# Altium PCB Yapa2.PcbDoc
Units mm, origin at the board's own origin, x right, y up, seen from the top; angles counter-clockwise.
Board outline 80 x 40 mm, 2 copper layers (Top Layer, Bottom Layer); 116 components, 96 nets, 419 pads, 194 vias.
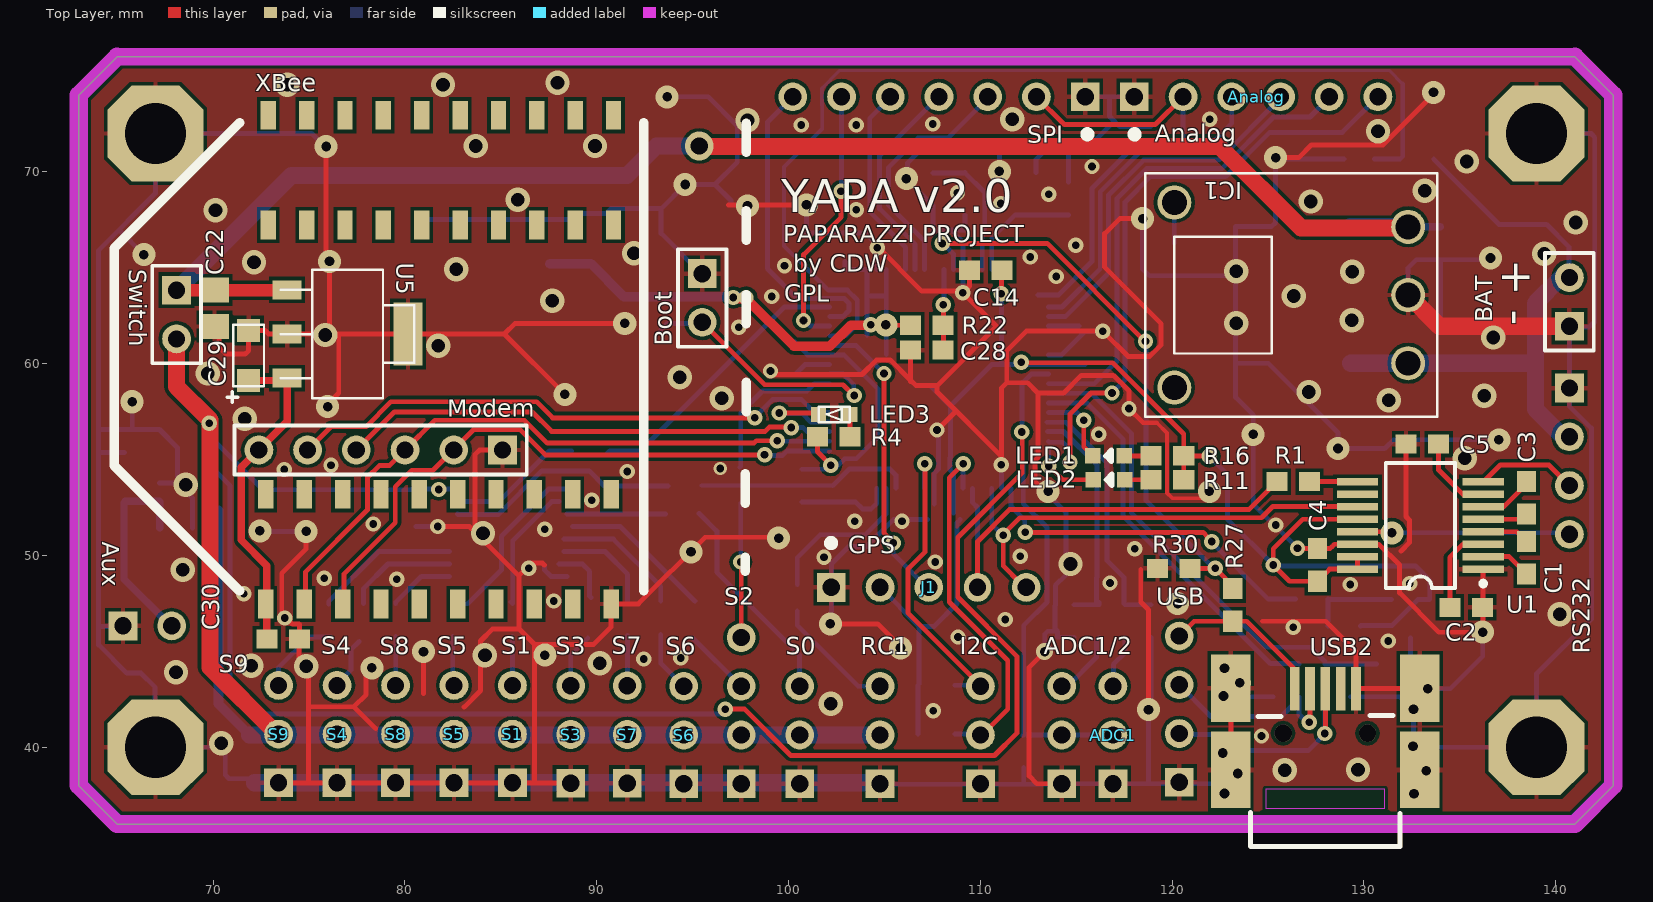
[diagram p0: Top Layer view]
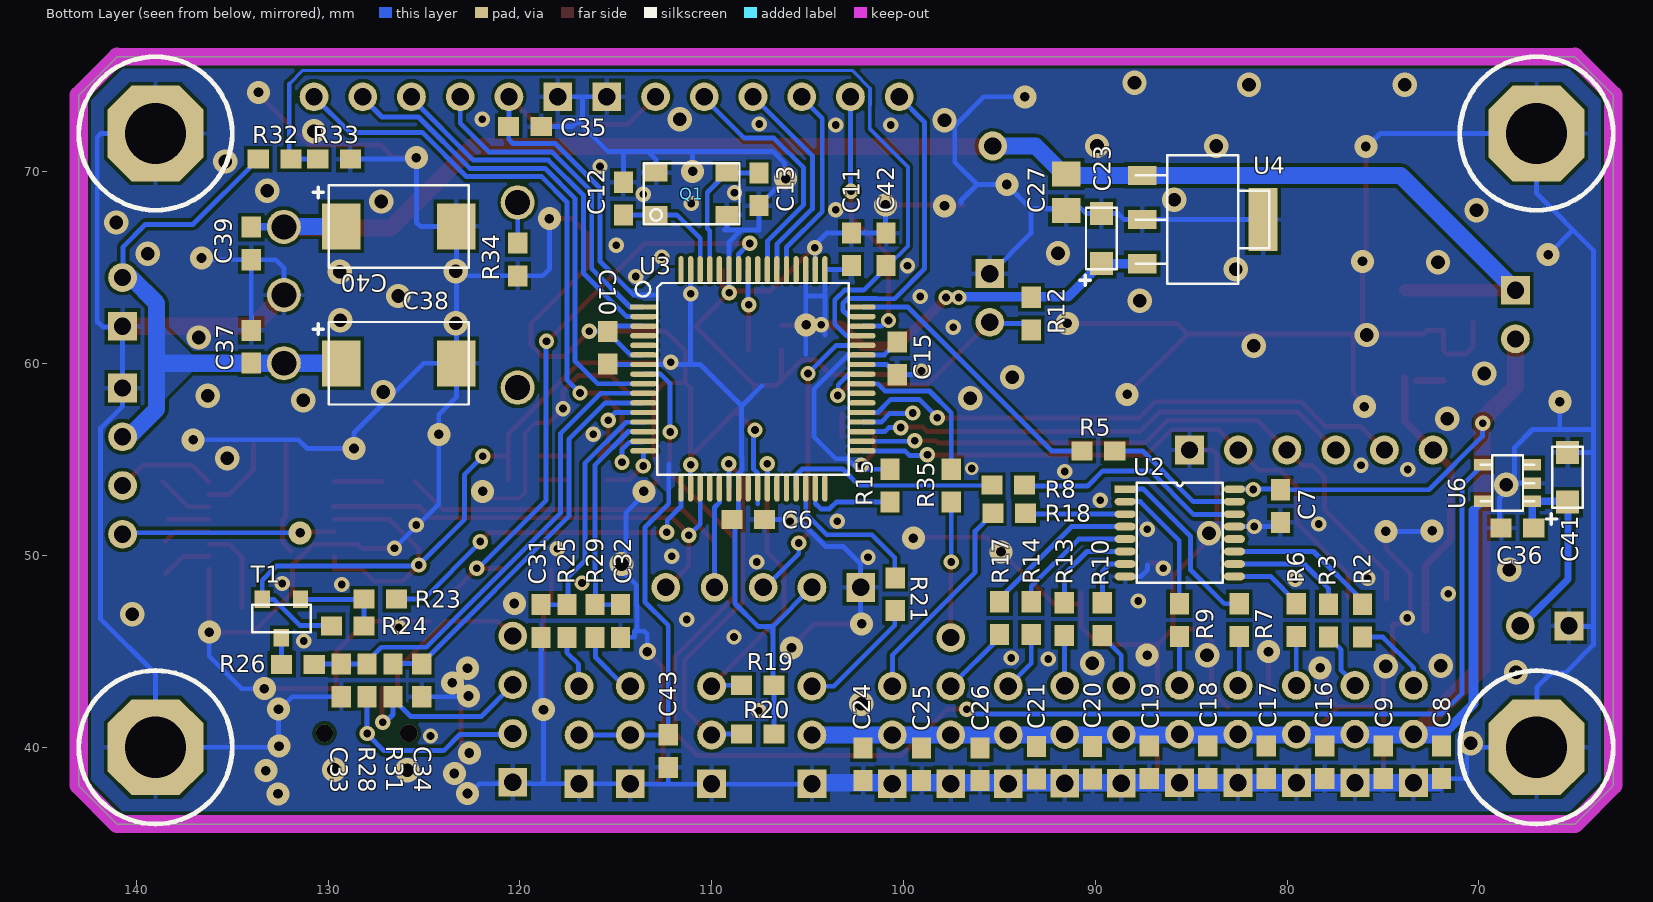
[diagram p1: Bottom Layer view, seen from below]

## Layer stack, top to bottom
Top Layer: signal copper 0.0356
Dielectric: dielectric 0.32, FR-4, Dk 4.8
Bottom Layer: signal copper 0.0356

## Board outline
63,38 63,74 65,76 141,76 143,74 143,38 141,36 65,36

## Design rules (kind name [scope] priority, off if disabled: settings)
Clearance [All] p1: gap=0.178
ComponentClearance [All] p1 off: gap=0 collisioncheckmode=3 verticalgap=0 showdistances=FALSE
HoleSize [All] p1: absolutevalues=TRUE maxlimit=5 minlimit=0.025 maxpercent=80.000 minpercent=20.000
MinimumSolderMaskSliver [All] p1: minsoldermaskwidth=0
PlaneConnect PlaneConnectVia [IsVia] p1: planeconnectstyle=Direct reliefexpansion=0.508 reliefentries=4 reliefconductorwidth=0.254 reliefairgap=0.254
PlaneConnect [All] p2: planeconnectstyle=Relief reliefexpansion=0.508 reliefentries=4 reliefconductorwidth=0.254 reliefairgap=0.254
PolygonConnect PolygonConnect_Via [IsVia] p1: connectstyle=Direct reliefconductorwidth=0.254 reliefentries=4 polygonreliefangle="90 Angle"
PolygonConnect [All] p2: connectstyle=Relief reliefconductorwidth=0.254 reliefentries=4 polygonreliefangle="90 Angle"
RoutingVias [All] p1: holewidth=0.711 width=1.27 viastyle="Through Hole" minholewidth=0.3 minwidth=0.7 maxholewidth=3 maxwidth=5
SilkToSilkClearance [All] p1: silktosilkclearance=0.025
SilkscreenOverComponentPads [All] p1 off: minsilkscreentomaskgap=0.025
SolderMaskExpansion SolderMaskExpansion_Via [IsVia] p1: expansion=-2.54
SolderMaskExpansion [All] p2: expansion=0.102
TestPointUsage [All] p1: valid=0 allowmultiple=FALSE
Testpoint [All] p1: side=15 testpointundercomponent=TRUE minsize=1.016 maxsize=2.54 preferedsize=1.524 minholesize=0 maxholesize=1.016 preferedholesize=0.813 testpointgrid=0.025 style=1023 order=0123456789
Width [All] p1: maxlimit=1.27 minlimit=0.152 preferedwidth=0.254 toplayer_minwidth=0.178 bottomlayer_minwidth=0.178 minimp=50.000000 maximp=50.000000 favimp=50.000000
18 further rules are at their usual default settings.

## Classes and differential pairs
component class Uart0: C1 C2 C3 C4 C5 R1 RS232 U1

## Components (designator, comment, footprint, x,y, rotation, side; value= is the part's Value field where it differs from the comment)
ADC1 "P1" HDR3 116.916,38.1 r90 top
ADC1/2 "P2" HDR3 114.249,38.1 r90 top
Analog "Analog" HDR6 118.034,73.914 r0 top
Aux "Digital" HDR2 65.303,46.33 r0 top
BAT "SUPPLY" HDR1X2 140.716,61.951 r90 top
Boot "Boot" HDR1X2 95.504,64.694 r270 top
C1 "0603" 0603 138.481,49.886 r270 top
C2 "0603" 0603 135.331,47.295 r0 top
C3 "0603" 0603 138.481,53.01 r270 top
C4 "0603" 0603 127.584,49.505 r270 top
C5 "0603" 0603 133.045,55.804 r0 top
C6 "100nF" 0603 108.102,51.867 r180 bottom
C7 "100nF" 0603 80.355,52.578 r270 bottom
C8 "100nF" 0603 71.945,39.212 r270 bottom
C9 "100nF" 0603 74.993,39.212 r270 bottom
C10 "100nF" 0603 115.418,60.833 r270 bottom
C11 "100nF" 0603 102.718,65.964 r90 bottom
C12 "18pF" 0603 114.605,68.605 r270 bottom
C13 "18pF" 0603 107.544,69.088 r90 bottom
C14 "100nF" 0603 110.287,64.872 r0 top
C15 "100nF" 0603 100.333,60.272 r90 bottom
C16 "100nF" 0603 78.041,39.212 r270 bottom
C17 "100nF" 0603 81.089,39.212 r270 bottom
C18 "100nF" 0603 84.137,39.212 r270 bottom
C19 "100nF" 0603 87.185,39.212 r270 bottom
C20 "100nF" 0603 90.145,39.192 r270 bottom
C21 "100nF" 0603 93.066,39.192 r270 bottom
C22 "470nF" 0805 70.079,62.89 r270 top
C23 "33uF/6V" T491A 89.687,66.523 r270 bottom
C24 "100nF" 0603 102.108,39.116 r270 bottom
C25 "100nF" 0603 99.06,39.116 r270 bottom
C26 "100nF" 0603 96.012,39.116 r270 bottom
C27 "470nF" 0805 91.516,68.936 r270 bottom
C28 "100nF" 0603 107.213,60.706 r180 top
C29 "33uF/6V" T491A 71.857,60.427 r270 top
C30 "0603" 0603 73.66,45.644 r180 top
C31 "100nF" 0603 118.897,46.584 r90 bottom
C32 "100nF" 0603 114.757,46.584 r90 bottom
C33 "18pF" 0603 129.311,43.485 r270 bottom
C34 "18pF" 0603 125.12,43.485 r270 bottom
C35 "100nF" 0603 119.736,72.365 r0 bottom
C36 "100nF" 0603 67.996,51.435 r0 bottom
C37 "100nF" 0603 134.01,66.269 r270 bottom
C38 "100uF/20V" T491D 126.314,60.02 r180 bottom
C39 "100nF" 0603 134.01,60.884 r90 bottom
C40 "100uF/20V" T491D 126.314,67.158 r180 bottom
C41 "33uF/6V" T491A 65.38,54.077 r270 bottom
C42 "100nF" 0603 100.914,65.964 r90 bottom
C43 "100nF" 0603 112.268,39.802 r90 bottom
I2C "Digital" HDR3 110.007,38.1 r90 top
IC1 "PTH_08080W" PTH_08080W 126.213,63.576 r0 top
J1 "GPS" HDR5 102.235,48.336 r0 top
LED1 "KP-1608SURC" KP-1608SURC 116.688,55.194 r180 top
LED2 "KP-1608SURC" KP-1608SURC 116.713,53.95 r180 top
LED3 "KP-1608SURC" KP-1608SURC 102.387,57.353 r180 top
Modem "Modem" HDR1X6 85.09,55.499 r180 top
Q1 "CTS405 12MHz" CTS_405 111.051,68.857 r180 bottom
R1 "1k" 0603RES 126.314,53.848 r0 top
R2 "1k" 0603RES 76.073,46.609 r270 bottom
R3 "1k" 0603RES 77.851,46.609 r270 bottom
R4 "1K" 0603RES 102.362,56.185 r180 top
R5 "1k" 0603RES 89.84,55.448 r180 bottom
R6 "1k" 0603RES 79.523,46.634 r270 bottom
R7 "1k" 0603RES 82.495,46.634 r270 bottom
R8 "1k" 0603RES 94.539,53.67 r180 bottom
R9 "1k" 0603RES 85.619,46.634 r270 bottom
R10 "1k" 0603RES 89.637,46.685 r270 bottom
R11 "1K" 0603RES 119.761,53.95 r0 top
R12 "10K" 0603RES 93.345,62.611 r90 bottom
R13 "1k" 0603RES 91.618,46.685 r270 bottom
R14 "1k" 0603RES 93.345,46.736 r270 bottom
R15 "10K" 0603RES 100.711,53.645 r90 bottom
R16 "1K" 0603RES 119.761,55.194 r0 top
R17 "1k" 0603RES 94.996,46.736 r270 bottom
R18 "1k" 0603RES 94.488,52.197 r0 bottom
R19 "10K" 0603RES 107.594,43.231 r180 bottom
R20 "10K" 0603RES 107.594,40.691 r180 bottom
R21 "1k" 0603RES 100.432,47.981 r270 bottom
R22 "10k" 0603RES 107.213,62.001 r0 top
R23 "1.5K" 0603RES 127.279,47.727 r0 bottom
R24 "10k" 0603RES 128.981,46.33 r0 bottom
R25 "1k" 0603RES 117.551,46.584 r270 bottom
R26 "1.5K" 0603RES 131.572,44.323 r0 bottom
R27 "1.8k" 0603RES 123.165,47.422 r270 top
R28 "33" 0603RES 127.965,43.485 r90 bottom
R29 "1k" 0603RES 116.078,46.584 r270 bottom
R30 "3.3k" 0603RES 120.091,49.327 r0 top
R31 "33" 0603RES 126.619,43.485 r90 bottom
R32 "10K" 0603RES 132.791,70.663 r0 bottom
R33 "1.5K" 0603RES 129.692,70.663 r0 bottom
R34 "330" 0603RES 120.117,65.43 r90 bottom
R35 "1k" 0603RES 97.511,53.645 r270 bottom
RC1 "Header 3" HDR3 104.775,38.1 r90 top
RS232 "rs232" HDR4 140.716,58.725 r270 top
S0 "S0" HDR3 100.584,38.1 r90 top
S1 "S1" HDR3 85.611,38.145 r90 top
S2 "Cam" HDR4 97.536,38.1 r90 top
S3 "S3" HDR3 88.646,38.125 r90 top
S4 "S4" HDR3 76.467,38.145 r90 top
S5 "S5" HDR3 82.563,38.145 r90 top
S6 "S6" HDR3 94.539,38.1 r90 top
S7 "S7" HDR3 91.592,38.125 r90 top
S8 "S8" HDR3 79.515,38.145 r90 top
S9 "S9" HDR3 73.419,38.145 r90 top
SPI "Spi" HDR7 115.468,73.914 r180 top
Switch "SUPPLY" HDR1X2 68.097,63.83 r270 top
T1 "BC807" BC807 132.436,46.711 r0 bottom
U1 "MAX3221EEAE" SSOP16 132.944,51.562 r90 top
U2 "4017" 4017PW 85.598,51.181 r180 bottom
U3 "LPC2148FBD64" LPC2148FBD64 107.851,59.205 r180 bottom
U4 "LT1963AEST-3.3" LM3940IMP-3.3 84.404,67.513 r270 bottom
U5 "LT1963AEST-3.3" LM3940IMP-3.3 77.013,61.544 r270 top
U6 "TPS2051B" TPS2051B 68.504,53.772 r90 bottom
USB "Remote USB Header" HDR4 120.371,38.176 r90 top
USB2 "Mini-Usb Connector" MINIUSB 127.991,36.83 r90 top
XBee "XBee Comm Module" XBEE 92.456,48.158 r90 top

## Footprints (in the part's own frame and the unit in brackets; to place one, negate y for a bottom-side part, rotate by r counter-clockwise, add the part's x,y. Pads: shape width x height; smd on the part's side, far side on the other; paste and mask are expansions set on the pad)
0603 [mm] "Chip Capacitor; Body 1.6 x 0.8 mm (LxW typ)"
  rect 1.1x1 smd: 1(-0.85,0) 2(0.85,0)
  body extent -1.12,-0.46 1.02,0.46, height 0.6
0603RES [mm] "Chip Capacitor; Body 1.6 x 0.8 mm (LxW typ)"
  rect 1.1x1 smd: 1(-0.85,0) 2(0.85,0)
  body extent -1.12,-0.46 1.02,0.46, height 0.4
0805 [mm] "Chip Capacitor; Body 2.0 x 1.2 mm (LxW typ)"
  rect 1.3x1.5 smd: 1(-0.95,0) 2(0.95,0)
  body extent -1.3,-0.66 1.32,0.66, height 0.8
4017PW [mm] "4x5 mm QFN"
  rect 1.1x0.4 smd: 1(-2.85,2.275)
  oval 1.1x0.4 smd: 2(-2.85,1.625) 3(-2.85,0.975) 4(-2.85,0.325) 5(-2.85,-0.325) 6(-2.85,-0.975) 7(-2.85,-1.625) 8(-2.85,-2.275) 9(2.85,-2.275) 10(2.85,-1.625) 11(2.85,-0.975) 12(2.85,-0.325) 13(2.85,0.325) 14(2.85,0.975) 15(2.85,1.625) 16(2.85,2.275)
  silkscreen extent -2.25,-2.6 2.25,2.6, body extent -2.31,-2.66 2.31,2.66, height 1.1
BC807 [mm]
  rect 0.8x0.9 smd: 1(-1,-1) 2(1,-1) 3(0,1)
  silkscreen extent -1.52,-0.71 1.52,0.71, body extent -1.59,-0.77 1.59,0.77, height 0.6
CTS_405 [mm]
  rect 1.2x0.9 smd: 1(-1.85,-1.1) 2(1.85,-1.1) 3(1.85,1.1) 4(-1.85,1.1)
  silkscreen extent -2.5,-1.6 2.5,1.6, body extent -2.5,-1.6 2.5,1.6, height 1.1
HDR1X2 [mm] "Connector; Header; 2 Position"
  rect 1.5x1.5 hole 0.9: 1(0,0)
  round 1.5 hole 0.9: 2(2.54,0)
  silkscreen extent -1.27,-1.27 3.81,1.27
HDR1X6 [mm] "Connector; Header; 6 Position"
  rect 1.5x1.5 hole 0.9: 1(0,0)
  round 1.5 hole 0.9: 2(2.54,0) 3(5.08,0) 4(7.62,0) 5(10.16,0) 6(12.7,0)
  silkscreen extent -1.27,-1.27 13.97,1.27
HDR2 [mm] "Connector; Header; 3 Position"
  rect 1.5x1.5 hole 0.9: 1(0,0)
  round 1.5 hole 0.9: 2(2.54,0)
  body extent -1.27,-1.27 3.81,1.27, height 7
HDR3 [mm] "Connector; Header; 3 Position"
  rect 1.5x1.5 hole 0.9: 1(0,0)
  round 1.5 hole 0.9: 2(2.54,0) 3(5.08,0)
  body extent -1.27,-1.27 6.35,1.27, height 7
HDR4 [mm] "Connector; Header; 4 Position"
  rect 1.5x1.5 hole 0.9: 1(0,0)
  round 1.5 hole 0.9: 2(2.54,0) 3(5.08,0) 4(7.62,0)
  body extent -1.37,-1.37 8.99,1.37, height 7
HDR5 [mm] "Connector; Header; 5 Position"
  rect 1.5x1.5 hole 0.9: 1(0,0)
  round 1.5 hole 0.9: 2(2.54,0) 3(5.08,0) 5(10.16,0)
  oval 1.4x1.5 hole 0.9: 4(7.62,0)
  body extent -1.37,-1.37 11.53,1.37, height 7
HDR6 [mm] "Connector; Header; 6 Position"
  rect 1.5x1.5 hole 0.9: 1(0,0)
  round 1.5 hole 0.9: 2(2.54,0) 3(5.08,0) 4(7.62,0) 5(10.16,0) 6(12.7,0)
  body extent -1.27,-1.27 13.97,1.27, height 7
HDR7 [mm] "Connector; Header; 6 Position"
  rect 1.5x1.5 hole 0.9: 1(0,0)
  round 1.5 hole 0.9: 2(2.54,0) 3(5.08,0) 4(7.62,0) 5(10.16,0) 6(12.7,0) 7(15.24,0)
  body extent -1.27,-1.27 16.51,1.27, height 7
KP-1608SURC [mm]
  rect 0.8x0.8 smd: 1(-0.825,0) 2(0.825,0)
  silkscreen extent -0.15,-0.3 0.15,0.3, body extent -0.81,-0.41 0.79,0.38, height 1.7
LM3940IMP-3.3 [mm]
  rect 1x1.5 smd: 1(-2.3,-3.15) 2(0,-3.15) 3(2.3,-3.15)
  rect 3.3x1.5 smd: 4(0,3.15)
  silkscreen extent -3.35,-3.48 3.35,3.48, body extent -3.35,-1.85 3.35,1.85, height 1.5
LPC2148FBD64 [mm]
  rect 1.4x0.28 smd: 1(-5.7,3.75)
  oval 1.4x0.28 smd: 2(-5.7,3.25) 3(-5.7,2.75) 4(-5.7,2.25) 5(-5.7,1.75) 6(-5.7,1.25) 7(-5.7,0.75) 8(-5.7,0.25) 9(-5.7,-0.25) 10(-5.7,-0.75) 11(-5.7,-1.25) 12(-5.7,-1.75) 13(-5.7,-2.25) 14(-5.7,-2.75) 15(-5.7,-3.25) 16(-5.7,-3.75) 33(5.7,-3.75) 34(5.7,-3.25) 35(5.7,-2.75) 36(5.7,-2.25) 37(5.7,-1.75) 38(5.7,-1.25) 39(5.7,-0.75) 40(5.7,-0.25) 41(5.7,0.25) 42(5.7,0.75) 43(5.7,1.25) 44(5.7,1.75) 45(5.7,2.25) 46(5.7,2.75) 47(5.7,3.25) 48(5.7,3.75)
  oval 0.28x1.4 smd: 17(-3.75,-5.7) 18(-3.25,-5.7) 19(-2.75,-5.7) 20(-2.25,-5.7) 21(-1.75,-5.7) 22(-1.25,-5.7) 23(-0.75,-5.7) 24(-0.25,-5.7) 25(0.25,-5.7) 26(0.75,-5.7) 27(1.25,-5.7) 28(1.75,-5.7) 29(2.25,-5.7) 30(2.75,-5.7) 31(3.25,-5.7) 32(3.75,-5.7) 49(3.75,5.7) 50(3.25,5.7) 51(2.75,5.7) 52(2.25,5.7) 53(1.75,5.7) 54(1.25,5.7) 55(0.75,5.7) 56(0.25,5.7) 57(-0.25,5.7) 58(-0.75,5.7) 59(-1.25,5.7) 60(-1.75,5.7) 61(-2.25,5.7) 62(-2.75,5.7) 63(-3.25,5.7) 64(-3.75,5.7)
  silkscreen extent -6.12,-5 5,5.06, body extent -5.06,-5.06 5.06,5.06, height 1.3
MINIUSB [mm]
  rect 2.25x0.5 smd: D+(6.225,0) D-(6.225,0.8) Gnd(6.225,-1.6) ID(6.225,-0.8) VBus(6.225,1.6)
  rect 4x2.05 smd: GND(2,4.925) GND(2,-4.925)
  rect 3.5x2.05 smd: GND(6.25,-4.925) GND(6.25,4.925)
  Top Layer keep-out region: 0.001,-3.098 0.991,-3.098 0.991,3.102 0.001,3.102
  silkscreen extent -2,-3.9 4.83,3.9, body extent -1.81,-4.95 7.19,4.95, height 4.6
PTH_08080W [mil]
  round 70 hole 51.18: 1(240,-140) 2(240,0) 3(240,140) 4(-240,190) 5(-240,-190)
  silkscreen extent -300,-250 300,250, body extent -300,-250 300,250, height 260
SSOP16 [mm] "SSOP; 16 Leads; Body Width 5.3 mm; Pitch 0.65 mm"
  rect 0.4x2.15 smd: 1(-2.275,-3.275) 2(-1.625,-3.275) 3(-0.975,-3.275) 4(-0.325,-3.275) 5(0.325,-3.275) 6(0.975,-3.275) 7(1.625,-3.275) 8(2.275,-3.275) 9(2.275,3.275) 10(1.625,3.275) 11(0.975,3.275) 12(0.325,3.275) 13(-0.325,3.275) 14(-0.975,3.275) 15(-1.625,3.275) 16(-2.275,3.275)
  silkscreen extent -3.25,-3.4 3.25,1.8, body extent -3.25,-1.8 3.25,1.8, height 1.99
T491A [mm]
  rect 1.2x1.2 smd: 1(1.3,0) 2(-1.3,0)
  silkscreen extent -1.6,-1.12 2.45,0.8, body extent -1.66,-0.86 1.66,0.86, height 1.8
T491D [mm]
  rect 2x2.4 smd: 1(-3,0) 2(3,0)
  silkscreen extent -4.48,-2.15 3.65,2.15, body extent -3.71,-2.21 3.71,2.21, height 3
TPS2051B [mm]
  rect 0.6x0.9 smd: 1(-0.95,-1.3) 2(0,-1.3) 3(0.95,-1.3) 4(0.95,1.3) 5(-0.95,1.3)
  silkscreen extent -1.45,-1.4 1.45,1.4, body extent -1.45,-0.8 1.45,0.8, height 0.9
XBEE [mm]
  rect 1.5x0.8 smd: 1(-0.686,19.702) 2(-0.686,17.702) 3(-0.686,15.702) 4(-0.686,13.702) 5(-0.686,11.702) 6(-0.686,9.702) 7(-0.686,7.702) 8(-0.686,5.702) 9(-0.686,3.702) 10(-0.686,1.702) 11(24.79,1.575) 12(24.79,3.575) 13(24.79,5.575) 14(24.79,7.575) 15(24.79,9.575) 16(24.79,11.575) 17(24.79,13.575) 18(24.79,15.575) 19(24.79,17.575) 20(24.79,19.575) nc(5.029,17.702) nc(5.029,19.702) nc(5.029,7.702) nc(5.029,9.702) nc(5.029,11.702) nc(5.029,13.702) nc(5.029,15.702) nc(5.029,1.702) nc(5.029,3.702) nc(5.029,5.702) nc(19.075,1.575) nc(19.075,3.575) nc(19.075,5.575) nc(19.075,7.575) nc(19.075,9.575) nc(19.075,11.575) nc(19.075,13.575) nc(19.075,15.575) nc(19.075,17.575) nc(19.075,19.575)
  silkscreen extent 0,-5.33 24.4,27.61, body extent -0.13,0.13 24.26,27.69, height 8

## Part data
ADC1 ADC1/2 I2C S0 S1 S2 S3 S4 S5 S6 S7 S8 S9: library part "Header 3", "Header, 3-Pin"
Analog: library part "Header 8", "Header, 8-Pin"
Aux BAT Boot Switch: library part "Header 2", "Header, 2-Pin"
C1 C2 C3 C4 C5 C30: library part Cap, "Capacitor"
C6 C7 C8 C9 C10 C11 C12 C13 C14 C15 C16 C17 C18 C19 C20 C21 C22 C24 C25 C26 C27 C28 C31 C32 C33 C34 C35 C36 C37 C39 C42 C43: library part CAP
C23 C29 C38 C40 C41: library part ELECTRO1
J1 Modem: library part "Header 5", "Header, 5-Pin"
LED1 LED2 LED3: "Led rouge 0603 (GRZ 10/2007)"
Q1: library part CRYSTAL_CTS_405, "Crystal 12 Mhz SMD (DMT 06/2007)"
R1 R2 R3 R4 R5 R6 R7 R8 R9 R10 R11 R12 R13 R14 R15 R16 R17 R18 R19 R20 R21 R22 R23 R24 R25 R26 R27 R28 R29 R30 R31 R32 R33 R34 R35: library part RES1
RC1: "Header, 3-Pin"
RS232 USB: library part "Header 4", "Header, 4-Pin"
SPI: library part "Header 7", "Header, 7-Pin"
T1: "PNP general purpose transistor ( GRZ 10/2007 )"
U1: "±15kV ESD-Protected, 1µA, 3.0V/5.5V, 250kbps, RS-232 Transceiver with AutoShutdown"
U3: "Single-chip ARM7 32-bit microcontroller (GRZ 04/2007)"
U4 U5: library part LM3940IMP-3.3, "Régulateur 3.3v LDO ( GRZ 09/2007)"
U6: "Current Limited Power Distribution Switch (GRZ 10/2007)"
USB2: library part USB_Host, "Mini USB Connector"
XBee: library part Xbee, "Header, 10-Pin, Dual row"

## Free pads (board coordinates)
  oct 5x5 hole 3.2: 0(67,40) 0(67,72) 0(139,40) 0(139,72)

## Via types
v1: diameter 0.8, hole 0.4, Top Layer to Bottom Layer, 93 vias
v2: diameter 1.27, hole 0.711, Top Layer to Bottom Layer, 49 vias
v3: diameter 1.2, hole 0.5, Top Layer to Bottom Layer, 47 vias
v4: diameter 0.9, hole 0.9, Top Layer to Bottom Layer, 2 vias
v5: diameter 1.5, hole 0.9, Top Layer to Bottom Layer, 1 vias
v6: diameter 0.889, hole 0.5, Top Layer to Bottom Layer, 1 vias
v7: diameter 0.7, hole 0.4, Top Layer to Bottom Layer, 1 vias

## Nets (pads, with @x,y where several pads share a name; then routed paths per layer and width w, separated by ;. In a path a pad name is that pad's centre, name@x,y a point inside that pad or via, vN(x,y) a via of type N, cw(c..) or ccw(c..) an arc to the next point about the centre after c; other vN are vias at no path point)
+3.3V: ADC1.2 ADC1/2.2 Analog.2 C4.2 C6.1 C10.2 C11.1 C14.2 C15.2 C23.1 C35.2 C43.2 J1.2 R4.2 R11.2 R12.2 R15.2 R16.2 R19.2 R20.2 R22.1 R24.2 SPI.2 T1.2 U1.12 U1.15 U1.16 U3.7 U3.23 U3.43 U3.49 U3.51 U3.63 U4.3 | length 173.1
  Top Layer w0.254: R4.2 101.512,55.409 v1(102.21,54.712) ; v3@105.131,62.001 R22.1 ; v1(111.1,63.652) C14.2@111.1,64.834 ; v1@112.116,60.046 116.898,60.046 120.611,56.333 R16.2 ; SPI.2 114.376,72.466 119.126,72.466 Analog.2 ; R11.2 R16.2 ; v1@121.945,55.093 121.844,55.194 R16.2 ; U1.15 U1.16 128.217,49.287 C4.2 126.123,48.655 v1(125.273,49.505) 125.273,50.343 126.817,51.887 U1.12
  Top Layer w0.381: v3@105.08,62.001 v3@105.131,62.001
  Top Layer w0.508: v1@97.18,63.398 97.788,63.398 100.277,60.909 102.159,60.909 103.251,62.001 v3@105.08,62.001
  Bottom Layer w0.254: C15.2 100.999,60.455 U3.43 102.892,60.455 104.673,58.674 104.673,56.185 103.53,55.042 102.927,55.042 102.38,54.495 R15.2 ; C11.1@102.946,65.317 102.946,64.922 102.964,64.905 U3.49 104.101,63.525 ; 104.101,61.493 104.101,63.525 ; J1.2 106.797,46.314 ; 105.076,63.525 104.101,63.525 ; 105.101,60.476 U3.51 ; R20.2 R19.2 106.797,43.284 106.797,46.314 ; 107.385,58.845 108.439,57.791 ; C6.1@108.601,52.218 U3.23 108.601,54.289 108.414,54.477 108.414,55.08 108.452,55.118 108.452,57.779 108.439,57.791 ; C6.1 108.788,51.703 108.788,47.498 107.594,46.304 106.807,46.304 106.797,46.314 ; 111.101,60.03 U3.63 ; C43.2@112.217,40.615 112.268,40.665 112.268,46.355 113.487,47.574 113.487,51.46 112.243,52.705 112.243,54.762 ; v1@112.344,59.853 v1@112.243,59.955 ; C43.2@112.434,40.64 ADC1/2.2 ; 113.003,63.576 114.071,63.576 115.824,65.329 115.824,69.143 118.157,71.476 120.371,71.476 120.586,71.691 C35.2 ; ADC1/2.2@114.122,40.64 ADC1/2.2 ; C10.2@115.468,59.955 U3.7 v1@112.243,59.955 ; ADC1.2@117.018,40.64 ADC1.2 ADC1/2.2 ; C35.2@120.574,72.376 Analog.2 ; v1@121.945,55.093 122.022,55.093 122.885,54.229 122.885,51.892 v1(125.273,49.505) 125.324,49.454 132.69,49.454 133.436,48.708 T1.2 132.826,47.711 131.47,46.355 129.857,46.355 R24.2 ; 108.439,57.791 110.603,59.955 v1@112.243,59.955
  Bottom Layer w0.508: U4.3 89.697,65.213 91.423,63.487 97.676,63.487 v1@97.765,63.398
  other v1: 121.945,55.169 112.141,60.071 104.292,62.027 97.13,63.449 97.79,63.449
  other v3: 105.08,62.027
+3.3VMODEM: C29.1 C30.2 Modem.6 U5.3 XBee.1 | length 16.1
  Top Layer w0.381: C29.1 U5.3@73.284,59.127 ; XBee.1 72.805,47.523 72.805,49.471 71.472,50.803 71.472,54.607 73.863,56.997 U5.3 ; C30.2@72.805,46.101 XBee.1@72.805,47.473
+5V: C22.1 C27.1 C37.1 C40.1 IC1.3 Switch.1 U4.1 U5.1 | length 80.1
  Top Layer w0.635: Switch.1@68.16,63.83 U5.1@73.849,63.83
  Top Layer w0.889: Switch.1 68.16,63.83 Switch.1@68.16,63.779 ; v5@95.301,71.628 95.606,71.323 122.479,71.323 126.721,67.081 132.309,67.081 IC1.3@132.461,66.929
  Bottom Layer w0.381: IC1.3 C37.1@133.997,67.132
  Bottom Layer w0.889: Switch.1 74.08,69.813 U4.1 91.581,69.813 93.116,71.349 95.072,71.349 v5@95.377,71.653 ; C40.1 IC1.3@132.283,67.158
  other v5: 95.352,71.349
+5V_BEC: C7.1 C8.1 C9.1 C16.1 C17.1 C18.1 C19.1 C20.1 C21.1 C24.1 C25.1 C26.1 RC1.2 S0.2 S1.2 S2.2 S3.2 S4.2 S5.2 S6.2 S7.2 S8.2 S9.2 Switch.2 U2.16 U6.5 | length 83.1
  Top Layer w0.889: Switch.2 68.097,58.801 69.85,57.048 69.85,44.171 73.336,40.685 S9.2
  Bottom Layer w0.254: v1@69.825,56.845 69.825,56.21 72.607,53.428 C7.1 ; C7.1@80.383,53.456 U2.16@82.331,53.456
  Bottom Layer w0.381: U6.5 70.282,52.344
  Bottom Layer w0.508: 70.282,52.344 70.282,42.266 71.882,40.665
  Bottom Layer w0.889: 71.907,40.64 RC1.2@104.902,40.64
  other v1: 81.763,53.442 69.799,56.896
A1: ADC1.3 R25.2 | length 2.7
  Bottom Layer w0.254: ADC1.3@116.942,43.282 116.942,44.323 117.551,44.933 R25.2
A2: ADC1/2.3 R29.2 | length 3.2
  Bottom Layer w0.254: ADC1/2.3@114.554,43.18 116.053,44.679 116.053,45.581 R29.2@116.205,45.734
ADC_3: U3.27
ADC_4: Analog.6 U3.15 | length 32.7
  Top Layer w0.254: v1(114.681,54.864) 114.681,57.379 115.773,58.471 v1(116.865,58.471) v1@116.916,58.471
  Bottom Layer w0.254: U3.15 113.606,55.9 114.295,55.9 114.681,55.514 114.681,55.093 v1@114.706,55.067 ; v1(116.865,58.471) 117.551,59.157 117.551,68.428 118.872,69.748 122.786,69.748 125.097,72.06 128.88,72.06 Analog.6
ADC_5: C32.2 R29.1 U3.14 | length 11.9
  Bottom Layer w0.254: U3.14@113.513,56.464 114.342,56.464 116.078,54.728 116.078,48.876 116.059,48.857 116.059,47.58 R29.1@116.078,47.561 ; C32.2@114.884,47.434 116.205,47.434 R29.1@116.205,47.549
ADC_6: C31.2 R25.1 U3.13 | length 13.1
  Bottom Layer w0.254: U3.13@113.487,56.947 114.47,56.947 116.611,54.805 116.611,49.733 117.485,48.86 117.485,47.5 R25.1 C31.2
ADC_7: U3.38
ASSOC: XBee.15
AUX: Aux.2 C36.1 C41.1 U6.1 | length 10.6
  Bottom Layer w0.381: C36.1@67.222,51.435 67.222,52.804 U6.1 65.425,52.822 65.354,52.751 65.354,48.768 Aux.2@67.742,46.38
BOOT: Boot.2 R12.1 U3.41 | length 13.7
  Top Layer w0.254: Boot.2@95.504,62.103 95.555,62.103 98.755,58.903 102.845,58.903 103.403,58.344 v1(103.429,58.344)
  Bottom Layer w0.254: R12.1 93.687,62.103 Boot.2@95.504,62.103 ; U3.41 102.851,59.455 103.403,58.903 v1@103.403,58.445
BUTTON: R15.1 U3.31 | length 5
  Bottom Layer w0.254: R15.1 103.491,52.795 103.861,52.426 104.318,52.426 104.601,52.709 U3.31
C1+: C1.2 U1.2 | length 2.6
  Top Layer w0.254: U1.2 137.579,49.937 C1.2
C1-: C1.1 U1.4 | length 2.5
  Top Layer w0.254: U1.4 137.979,51.237 C1.1
C2+: C3.2 U1.5 | length 2.1
  Top Layer w0.254: U1.5 C3.2@138.36,51.887
C2-: C3.1 U1.6 | length 3
  Top Layer w0.254: U1.6 137.297,52.537 138.62,53.86 C3.1@138.633,53.86
CAM_SW: R35.1 U3.40 | length 8.1
  Bottom Layer w0.254: R35.1@97.46,54.597 97.511,54.648 97.511,57.436 98.647,58.572 99.701,58.572 99.706,58.567 100.959,58.567 101.347,58.955 U3.40
CAMSW: R35.2 S2.4 | length 7
  Top Layer w0.254: S2.4 v1@97.536,49.657
  Bottom Layer w0.254: v1@97.511,49.632 R35.2@97.511,52.744
  other v1: 97.511,49.657
CTS: Modem.5 U3.37 | length 29.3
  Top Layer w0.254: Modem.5 76.149,56.718 77.978,56.718 79.273,58.014 86.868,58.014 87.706,57.175 v1(98.247,57.175)
  Bottom Layer w0.254: v1@98.273,57.175 98.273,57.226 99.187,58.141 99.522,58.141 99.527,58.135 100.666,58.135 101.346,57.455 U3.37
DRDY: SPI.6 U3.46 | length 14.1
  Top Layer w0.254: v1(100.787,62.25) 100.787,65.684 102.743,67.64 v1@102.743,69.012
  Bottom Layer w0.254: v1@100.736,62.357 101.138,61.955 U3.46 ; v1@102.768,68.936 SPI.6
  other v1: 102.743,68.986
DTR: U3.39
GND: ADC1.1 ADC1/2.1 Analog.1 Aux.1 BAT.1 Boot.1 C2.2 C4.1 C5.1 C6.2 C7.2 C8.2 C9.2 C10.1 C11.2 C12.1 C13.1 C14.1 C15.1 C16.2 C17.2 C18.2 C19.2 C20.2 C21.2 C22.2 C23.2 C24.2 C25.2 C26.2 C27.2 C28.2 C29.2 C30.1 C31.1 C32.1 C33.2 C34.2 C35.1 C36.2 C37.2 C38.2 C39.2 C40.2 C41.2 C42.2 C43.1 I2C.1 IC1.2 J1.1 Modem.1 pad.0 Q1.2 Q1.4 R30.1 R33.1 R34.1 RC1.1 RS232.1 S0.1 S1.1 S2.1 S3.1 S4.1 S5.1 S6.1 S7.1 S8.1 S9.1 SPI.1 U1.1 U1.14 U2.8 U2.13 U3.3 U3.6 U3.18 U3.25 U3.42 U3.50 U3.59 U4.2 U4.4 U5.2 U5.4 U6.2 USB2.Gnd USB2.GND USB.1 XBee.10 | length 632.3
  Top Layer w0.203: 119.202,56.921 119.74,56.383 119.74,53.259 120.015,52.984 v3@121.59,52.984
  Top Layer w0.254: C22.2@70.307,62.167 70.307,60.884 70.688,60.503 71.679,60.503 71.857,60.681 C29.2 72.716,61.727 72.898,61.544 U5.2 U5.4 85.192,61.544 ; S9.1 74.981,38.145 ; C30.1@74.485,45.745 74.485,44.565 74.981,44.069 74.981,42.113 ; C30.1 74.51,46.406 74.498,46.418 74.131,46.418 73.584,46.965 73.584,49.073 74.854,50.343 v3(74.854,51.257) ; v3@75.895,65.507 v3(75.895,71.323) ; v3@75.971,57.887 76.556,58.471 76.556,61.519 ; v2@76.073,61.57 v3(76.073,65.329) ; v3@77.978,44.12 77.978,42.748 77.343,42.113 ; 78.485,40.971 77.343,42.113 ; 80.975,42.799 v3(80.975,44.983) ; v1@81.483,51.511 v1(81.712,51.511) 83.363,51.511 v2@83.668,51.206 ; 83.09,42.094 83.947,42.951 83.947,45.542 84.574,46.169 85.954,46.169 ; Modem.1 83.896,55.499 83.668,55.27 v2@83.668,51.206 ; 86.766,45.364 89.84,45.364 90.754,46.279 XBee.10 ; 87.274,49.505 87.173,49.606 86.589,49.606 85.928,48.946 ; v3(88.341,58.395) 85.192,61.544 ; S3.1@88.659,38.145 86.766,38.145 ; XBee.10@90.754,48.057 XBee.10 ; v3(91.465,62.103) 85.75,62.103 85.192,61.544 ; 96.876,68.275 v3(100.94,68.275) ; v1@99.314,59.436 103.835,59.436 104.597,60.198 105.308,60.198 106.363,59.143 ; v3(99.492,50.902) 99.441,50.952 95.656,50.952 92.177,47.473 XBee.10 ; v3(102.184,46.431) 104.648,46.431 v3@105.918,45.161 ; v1@104.597,66.142 106.959,63.779 109.169,63.779 109.437,64.047 C14.1 ; 106.363,59.069 106.363,59.143 ; C28.2 106.363,59.143 ; v1(107.747,56.54) 108.687,57.48 ; v1(109.093,63.703) 110.846,61.951 107.747,58.852 ; v1(111.1,54.737) 111.1,55.169 ; v6(113.36,44.983) 112.547,44.171 112.547,38.506 112.954,38.1 ADC1/2.1 ; v3@113.436,53.264 112.859,53.842 112.859,54.953 113.005,55.099 113.005,58.471 ; 118.364,49.276 118.364,47.574 118.77,47.168 v3(118.77,41.961) ; v3(118.466,67.564) 117.272,67.564 116.484,66.777 116.484,65.024 119.431,62.078 119.431,60.979 118.827,60.376 117.704,60.376 v1(116.383,61.697) 112.395,61.697 111.379,60.681 111.379,59.004 ; 119.202,56.921 118.491,56.921 v1(117.754,57.658) 117.754,58.579 116.948,59.385 115.265,59.385 114.351,58.471 113.005,58.471 ; USB2.GND@123.066,38.83 USB2.GND@123.066,43.08 ; 124.714,46.572 128.002,46.572 129.591,44.983 USB2.Gnd USB2.GND@132.891,43.055 ; v3(125.4,70.739) 126.594,70.739 127.254,71.399 130.988,71.399 v3@133.604,74.016 ; v1@126.58,50.355 C4.1 128.231,50.355 ; 128.314,50.438 128.463,50.587 U1.14 130.774,50.587 131.86,49.501 131.86,48.048 133.909,45.999 v3(136.195,45.999) ; 131.937,50.225 132.375,50.663 132.375,51.851 132.195,52.031 C5.1 ; v3@136.219,46.152 U1.1 ; 74.981,38.145 74.981,42.113 ; 74.981,38.145 S4.1 S8.1 S5.1 S1.1 86.766,38.145 ; 74.981,42.113 77.343,42.113 ; v2@83.668,51.206 85.928,48.946 ; 85.928,48.946 85.954,48.92 85.954,46.169 ; 85.954,46.169 86.766,45.356 86.766,38.145 ; 106.363,59.143 106.655,58.852 107.747,58.852 ; 107.747,58.852 107.747,58.522 111.1,55.169 ; 111.1,55.169 111.1,58.725 111.379,59.004 ; 111.379,59.004 112.471,59.004 113.005,58.471
  Top Layer w0.889: IC1.2 133.934,61.951 BAT.1
  Bottom Layer w0.254: 64.059,46.304 Aux.1@65.354,46.304 ; 64.063,55.377 C41.2 ; 65.113,66.967 v3(66.396,65.684) ; 65.786,56.617 v3(65.786,58.014) ; pad.0@66.98,40.081 66.98,43.129 66.243,43.866 65.507,43.866 64.033,45.339 64.033,56.566 ; pad.0@67,40 70.414,40 70.637,39.776 70.637,38.557 70.833,38.362 C8.2 ; U6.2 v2@68.148,53.772 ; C36.2@68.922,51.435 68.922,52.998 v2@68.148,53.772 ; v3@72.517,51.257 v3(74.854,51.257) ; v3@75.895,71.247 75.142,72 67,72 67,68.88 64.033,65.913 64.033,56.566 ; C7.2@80.577,51.506 U2.13@82.331,51.506 ; U4.4 U4.2 88.494,67.513 88.803,67.823 C23.2 90.479,67.823 90.742,68.086 91.516,68.086 93.359,68.086 ; 87.274,49.505 87.274,49.251 87.619,48.906 U2.8 ; v3(93.675,73.914) 95.809,73.914 97.333,72.39 97.333,70.51 96.164,69.342 ; Boot.1@95.504,64.643 93.359,66.788 93.359,68.086 ; 97.003,68.377 97.003,68.504 96.164,69.342 ; v1@99.314,59.436 C15.1@100.318,59.436 ; C15.1 100.866,59.955 U3.42 ; C42.2 C11.2 104.001,66.814 v1@104.601,66.214 ; C42.2@100.94,66.839 v3(100.94,68.275) ; v3@102.235,46.482 J1.1 102.235,49.555 103.149,50.47 104.064,50.47 105.461,51.867 C6.2 ; U3.50 v1@104.601,66.142 ; RC1.1@104.775,38.252 104.953,38.075 114.529,38.075 114.554,38.1 117.602,38.1 120.447,38.1 122.123,38.1 v3@122.58,37.643 ; 107.601,52.68 U3.25 107.601,54.28 107.817,54.496 107.817,56.471 v1(107.747,56.54) ; 108.483,66.954 109.101,66.337 U3.59 v1@109.101,63.711 ; Q1.2 109.201,67.1 109.328,66.973 ; 109.347,66.954 109.328,66.973 ; v3@110.998,69.85 110.998,71.044 ; U3.18 v1@111.101,54.634 ; 112.268,38.1 C43.1 ; Q1.4 112.901,70.636 113.335,71.069 ; v6(113.36,44.983) 113.36,45.898 113.513,46.05 114.034,46.05 ; v3@113.436,53.264 114.478,52.222 114.478,48.997 113.919,48.438 113.919,47.395 113.894,47.37 113.894,46.191 114.034,46.05 ; U3.6 114.24,60.455 115.418,61.633 C10.1 v1@116.371,61.683 ; U3.3 C10.1@115.146,61.955 ; C12.1 114.605,70.917 114.452,71.069 ; C32.1@114.884,45.734 C32.1 114.034,45.734 114.034,46.05 ; SPI.1 116.738,73.914 ; Analog.1 116.738,73.914 ; v3(118.466,67.564) 118.466,64.922 118.808,64.58 R34.1 v2@123.252,64.58 ; 118.77,38.125 v3(118.77,41.961) ; C35.1 117.272,72.365 116.992,72.644 ; v3@118.897,41.91 C31.1 ; v3@122.846,42.635 C34.2@125.273,42.635 ; v3(125.4,70.739) 125.4,67.361 125.197,67.158 C40.2 C38.2 ; v3@125.425,70.663 R33.1@128.956,70.663 ; v1(126.543,50.368) 124.231,52.68 v3(124.231,56.312) 124.231,57.328 123.314,58.245 C38.2 ; C33.2 131.863,42.635 v3@132.283,42.215 ; v3@132.258,41.681 v3@132.258,42.189 ; IC1.2 132.309,64.694 ; 132.309,64.821 132.309,64.694 ; v3@132.517,40 132.563,40 139,40 139,43.826 141.859,46.685 141.859,56.642 140.716,57.785 BAT.1 ; v3@132.588,40.076 v3(132.588,41.986) ; v3(133.325,43.053) 134.493,43.053 136.195,44.755 v3(136.195,45.999) ; C39.2 C37.2 ; v3@136.513,65.419 C37.2 ; v3(137.033,56.032) 131.547,56.032 131.089,55.575 v3(128.651,55.575) 128.651,56.388 125.019,60.02 C38.2 ; pad.0@139,72 141.843,72 142.037,71.806 142.037,62.154 ; BAT.1@140.716,61.9 141.732,61.9 142.037,62.205 ; 64.033,56.566 67.208,56.566 68.148,55.626 v2@68.148,53.772 ; 93.359,68.086 v3(94.615,69.342) 96.164,69.342 ; 109.328,66.973 107.563,66.973 107.544,66.954 C13.1 106.209,69.572 106.209,70.471 106.807,71.069 113.335,71.069 ; 113.335,71.069 114.452,71.069 ; 114.452,71.069 115.418,71.069 116.992,72.644 ; 116.738,73.914 116.738,72.898 116.992,72.644 ; 132.309,64.694 132.309,64.999 132.729,65.419 C37.2
  Bottom Layer w0.889: C8.2@72.156,38.151 RC1.1@104.775,38.151
  other v1: 124.663,40.589 107.544,41.91 92.456,44.602 94.386,44.653 131.267,45.542 108.839,45.745 126.314,46.253 111.303,46.66 73.736,46.736 87.757,47.625 71.603,48.006 129.286,48.489 132.385,48.539 116.764,48.565 79.578,48.768 75.794,48.819 86.462,49.327 107.645,49.657 101.854,49.911 112.09,49.962 118.059,50.343 87.3,51.359 125.4,51.587 78.359,51.638 103.454,51.791 105.918,51.791 89.738,52.883 91.592,54.381 73.711,54.483 76.149,54.712 116.18,56.312 99.06,59.614 97.409,61.9 99.136,63.5 113.97,64.541 99.797,65.1 112.598,65.557 104.623,66.04 114.986,66.167 103.53,68.021 111.074,68.351 113.563,68.834 108.814,68.91 115.824,70.282 100.66,72.441 103.53,72.441 107.518,72.492 121.971,72.746
  other v2: 125.882,38.811 129.692,38.837 70.434,40.208 102.21,42.266 68.072,43.917 74.854,44.221 71.984,44.247 90.17,44.374 84.176,44.806 140.208,46.939 68.428,49.251 114.706,49.555 84.074,51.156 68.58,53.696 135.255,55.067 71.653,57.125 131.293,58.09 96.52,58.191 136.271,58.318 127.127,58.522 94.336,59.284 69.723,59.487 81.737,60.935 136.754,61.366 75.844,61.493 123.342,62.103 129.362,62.255 87.681,63.271 126.34,63.525 129.388,64.795 123.342,64.821 82.677,64.922 72.136,65.278 139.395,65.735 91.948,65.761 141.046,67.361 70.129,67.996 127.229,68.453 85.877,68.555 133.172,69.012 135.357,70.536 83.693,71.349 89.916,71.349 130.734,72.111 97.866,72.695 111.658,72.746 73.863,74.549 81.991,74.549 87.96,74.651
  other v3: 132.613,37.567 122.733,37.592 123.419,38.633 133.248,38.786 122.631,39.7 132.563,40.056 122.682,42.672 123.52,43.358 122.733,44.12 78.283,44.145 87.3,44.806 105.842,45.187 120.294,47.498 94.92,50.19 72.441,51.283 113.538,53.34 121.945,53.34 75.971,57.76 136.601,65.507 97.866,68.224 106.147,69.647 110.998,70.028 133.629,74.143
  other v7: 96.444,54.534
GPS_RESET: J1.3 U3.44 | length 15.6
  Top Layer w0.254: v1@104.978,59.461 104.978,51.181 v1@105.537,50.622
  Bottom Layer w0.254: U3.44 103.518,60.955 v1@104.919,59.554 ; v1(105.461,50.648) 105.461,50.089 107.213,48.336 J1.3
  other v1: 104.978,59.487
IRH_1: Analog.4 U3.2 | length 19.3
  Bottom Layer w0.254: U3.2 114.423,62.455 116.688,64.719 116.688,68.785 118.514,70.612 122.428,70.612 125.654,73.838 Analog.4
IRH_2: Analog.5 U3.9 | length 25.8
  Bottom Layer w0.254: U3.9 115.953,58.955 117.119,60.122 117.119,68.606 118.693,70.18 122.607,70.18 125.286,72.859 127.19,72.859 128.194,73.863 Analog.5
IRV: Analog.3 U3.1 | length 17.3
  Bottom Layer w0.254: U3.1 114.263,62.955 116.256,64.948 116.256,68.964 118.335,71.044 121.615,71.044 123.114,72.542 Analog.3
L1: LED1.1 R16.1 | length 1.4
  Top Layer w0.254: LED1.1 R16.1
L2: LED2.1 R11.1 | length 1.4
  Top Layer w0.254: LED2.1 R11.1
L3: LED3.1 R4.1 | length 1.2
  Top Layer w0.254: R4.1 LED3.1@103.212,57.379
LED1: LED1.2 U3.12 | length 4.1
  Top Layer w0.254: v1@115.367,57.048 115.392,57.023 115.392,55.665 LED1.2
  Bottom Layer w0.254: U3.12 115.036,57.455 115.367,57.125 v1@115.367,57.048
  other v1: 115.392,57.048
LED2: LED2.2 U3.16 | length 3
  Top Layer w0.254: v1@113.563,54.686 114.3,53.95 115.482,53.95
  Bottom Layer w0.254: v1@113.551,54.699 U3.16
  other v1: 113.563,54.661
LED3: LED3.2 U3.36 | length 5
  Top Layer w0.254: v1@99.441,57.429 LED3.2@101.537,57.429
  Bottom Layer w0.254: v1@99.441,57.429 99.492,57.404 100.711,57.404 101.16,56.955 U3.36
  other v1: 99.517,57.429
LPC_RESET: C28.1 R22.2 U3.57 | length 4.2
  Top Layer w0.254: C28.1@108.077,60.72 v1(108.077,63.068)
  Bottom Layer w0.254: v1@108.101,63.07 U3.57
LPC_RXD: J1.4 R1.1 U3.21 | length 24.9
  Top Layer w0.254: J1.4@109.855,48.184 109.855,50.724 111.531,52.4 124.016,52.4 R1.1
  Bottom Layer w0.254: U3.21 109.601,52.756 109.855,52.502 J1.4@109.855,48.158
LPC_TXD: J1.5 U1.11 U3.19 | length 24.6
  Top Layer w0.254: J1.5@112.065,48.59 111.201,49.454 111.201,51.105 112.065,51.968 124.663,51.968 125.247,52.553 U1.11@129.743,52.553
  Bottom Layer w0.254: U3.19 110.601,51.629 v1@111.105,51.125
  other v1: 111.201,51.054
MISO: SPI.5 U3.53 | length 10.2
  Bottom Layer w0.254: SPI.5@105.334,73.889 104.241,72.796 104.241,67.92 106.101,66.06 U3.53
MOSI: SPI.4 U3.54 | length 11
  Bottom Layer w0.254: U3.54 106.601,66.221 104.75,68.072 104.75,70.841 107.569,73.66 SPI.4@107.569,73.99
NetR23_2: R23.2 R24.1 T1.1 | length 4.7
  Bottom Layer w0.254: R24.1 R23.2@128.131,47.725 ; R23.2@128.164,47.711 T1.1
NetR26_2: R26.2 T1.3 | length 1.4
  Bottom Layer w0.254: R26.2@132.436,44.337 T1.3
PPM_IN: R21.1 U3.30 | length 8.3
  Bottom Layer w0.254: R21.1@100.457,48.475 100.457,49.886 101.651,51.079 104.013,51.079 105.101,52.167 U3.30
PWR_SW: U3.8 U6.4 | length 77.9
  Top Layer w0.254: v1(96.698,41.986) 97.714,41.986 100.127,39.573 110.744,39.573 111.912,40.742 111.912,44.747 108.826,47.834 108.826,50.939 112.192,54.305 v1@112.192,56.464
  Bottom Layer w0.254: U6.4 70.891,53.634 70.891,42.799 71.951,41.74 96.451,41.74 v1(96.698,41.986) ; v1@112.185,56.464 112.185,58.972 112.668,59.455 U3.8
  other v1: 112.166,56.439
RC: R21.2 RC1.3 | length 6.4
  Bottom Layer w0.254: R21.2@100.457,47.105 100.457,46.355 103.632,43.18 RC1.3
RSSI: XBee.6
RTS: Modem.4 U3.35 | length 26.1
  Top Layer w0.254: Modem.4 79.451,57.48 86.639,57.48 87.649,56.471 98.787,56.471 99.009,56.693 100.101,56.693 v1@100.152,56.642
  Bottom Layer w0.254: v1@100.152,56.642 100.178,56.667 100.762,56.667 100.974,56.455 U3.35
  other v1: 100.152,56.667
RX232: RS232.3 U1.8 | length 5.3
  Top Layer w0.254: U1.8 136.235,53.837 137.112,54.715 139.646,54.715 RS232.3
RXD1: Modem.3 U3.34 XBee.2 | length 33.6
  Top Layer w0.254: XBee.2@74.83,47.727 74.83,49.151 78.049,52.37 78.049,54.064 78.672,54.686 79.197,54.686 Modem.3 ; Modem.3@80.035,55.524 81.559,57.048 86.233,57.048 87.427,55.855 98.201,55.855 98.328,55.982 v1(99.416,55.982) v1@99.441,55.956
  Bottom Layer w0.254: v1@99.416,55.955 U3.34
RXTTL: R1.2 U1.9 | length 2.5
  Top Layer w0.254: R1.2 U1.9@129.658,53.848
S0: R18.2 S0.3 | length 11.2
  Bottom Layer w0.254: R18.2 96.266,51.269 96.266,49.124 100.584,44.806 S0.3
S1: R9.2 S1.3 | length 2.6
  Bottom Layer w0.254: S1.3@85.619,43.234 R9.2
S2: R17.2 S2.3 | length 3.6
  Bottom Layer w0.254: R17.2@94.996,45.72 S2.3
S3: R10.2 S3.3 | length 2.9
  Bottom Layer w0.254: S3.3@88.648,43.207 88.648,44.807 R10.2@89.535,45.695
S4: R3.2 S4.3 | length 2.7
  Bottom Layer w0.254: S4.3@76.429,43.263 77.191,44.025 77.191,45.085 R3.2@77.622,45.517
S5: R7.2 S5.3 | length 2.5
  Bottom Layer w0.254: S5.3@82.495,43.293 R7.2
S6: R14.2 S6.3 | length 3.2
  Bottom Layer w0.254: R14.2 93.345,44.374 S6.3
S7: R13.2 S7.3 | length 2.6
  Bottom Layer w0.254: S7.3@91.618,43.231 R13.2
S8: R6.2 S8.3 | length 2.6
  Bottom Layer w0.254: S8.3@79.523,43.234 R6.2
S9: R2.2 S9.3 | length 4.3
  Bottom Layer w0.254: S9.3@73.406,43.238 73.406,44.145 75.006,45.745 R2.2@76.149,45.745
S_CLK: R8.2 U2.14 | length 12.3
  Bottom Layer w0.254: U2.14 82.777,52.127 84.868,52.127 87.147,54.407 89.611,54.407 90.399,53.619 R8.2@93.726,53.619
S_RST: R5.2 U2.15 | length 7
  Bottom Layer w0.254: U2.15 84.886,52.806 87.528,55.448 R5.2@88.697,55.448
SCK: SPI.7 U3.47 | length 16
  Bottom Layer w0.254: SPI.7 98.908,72.593 98.908,64.948 100.469,63.387 101.394,63.387 101.407,63.4 102.895,63.4 103.156,63.139 103.156,62.77 102.841,62.455 U3.47
SCL: I2C.2 R20.1 U3.22 | length 19.1
  Top Layer w0.254: v1(109.118,54.788) 108.382,54.051 108.382,47.574 111.43,44.526 111.43,41.986 110.49,41.046 I2C.2@110.49,40.64
  Bottom Layer w0.254: R20.1@108.673,40.691 I2C.2@110.439,40.691 ; U3.22 v1@109.101,54.72
SDA: I2C.3 R19.1 U3.26 | length 17
  Top Layer w0.254: v1(107.112,54.788) 107.112,50.165 106.223,49.276 106.223,47.015 110.058,43.18 I2C.3@110.49,43.18
  Bottom Layer w0.254: U3.26 v1@107.101,54.726 ; R19.1@108.673,43.231 I2C.3@110.439,43.231
SERV_CLK: R8.1 U3.29 | length 12.1
  Bottom Layer w0.229: R8.1@95.479,53.645 102.311,53.645
  Bottom Layer w0.254: 102.311,53.645 103.176,54.51 104.038,54.51 ; 103.891,54.51 104.038,54.51 ; U3.29@105.601,54.158 U3.29 105.601,54.194 105.285,54.51 104.038,54.51
SERV_RST: R5.1 U3.48 | length 14.8
  Bottom Layer w0.254: R5.1@90.537,55.296 R5.1 92.278,55.448 99.785,62.955 U3.48
SERVO0: R18.1 U2.3 | length 5.1
  Bottom Layer w0.254: U2.3 R18.1@93.597,52.156
SERVO1: R9.1 U2.2 | length 6.6
  Bottom Layer w0.254: R9.1@85.525,47.578 R9.1 ; R9.1@85.623,47.578 85.623,50.776 87.653,52.806 U2.2@88.031,52.806
SERVO2: R17.1 U2.4 | length 8
  Bottom Layer w0.254: U2.4@88.748,51.511 91.237,51.511 R17.1@95.123,47.625
SERVO3: R10.1 U2.7 | length 3.2
  Bottom Layer w0.254: U2.7@88.031,49.556 89.255,49.556 89.637,49.174 89.637,47.879 R10.1@89.713,47.803
SERVO4: R3.1 U2.10 | length 5.8
  Bottom Layer w0.254: R3.1@77.837,47.484 77.837,48.272 79.121,49.556 U2.10@82.331,49.556
SERVO5: R7.1 U2.1 | length 9.5
  Bottom Layer w0.254: R7.1 83.273,47.484 85.039,49.251 85.039,51.003 87.492,53.456 U2.1
SERVO6: R14.1 U2.5 | length 6.8
  Bottom Layer w0.254: U2.5@88.29,50.856 90.876,50.856 93.345,48.387 R14.1@93.345,47.625
SERVO7: R13.1 U2.6 | length 5.3
  Bottom Layer w0.254: U2.6@88.29,50.206 90.434,50.206 91.618,49.022 R13.1
SERVO8: R6.1 U2.9 | length 3.4
  Bottom Layer w0.254: R6.1 79.523,47.57 80.859,48.906 U2.9@82.331,48.906
SERVO9: R2.1 U2.11 | length 7.5
  Bottom Layer w0.254: R2.1@76.035,47.46 76.035,47.612 78.628,50.206 U2.11@82.331,50.206
SSEL: SPI.3 U3.55 | length 12.7
  Bottom Layer w0.254: U3.55 107.101,66.381 105.207,68.275 105.207,70.206 106.756,71.755 108.306,71.755 SPI.3@110.338,73.787
TX232: RS232.4 U1.13 | length 11
  Top Layer w0.254: U1.13 v3@131.349,51.237
  Bottom Layer w0.254: v3@131.369,51.181 RS232.4@140.716,51.181
  other v3: 131.46,51.181
TXD1: Modem.2 U3.33 XBee.3 | length 31.4
  Top Layer w0.254: XBee.3@76.835,47.803 76.835,49.047 79.502,51.714 79.502,53.582 80.364,54.444 81.47,54.444 83.579,56.554 86.016,56.554 87.325,55.245 v1@98.552,55.245
  Bottom Layer w0.254: v1@98.577,55.22 99.695,55.22 99.93,55.455 U3.33
  other v1: 98.755,55.245
USB+: R28.1 USB2.D+ USB.2 | length 12.6
  Top Layer w0.254: v1@127.991,40.742 USB2.D+
  Bottom Layer w0.254: USB.2 120.421,40.665 123.138,40.665 123.976,39.827 127.102,39.827 127.965,40.691 v1(127.965,40.716) R28.1
USB-: R31.1 USB2.D- USB.3 | length 10.2
  Top Layer w0.254: v1@127.191,41.567 USB2.D-
  Bottom Layer w0.254: USB.3 122.022,41.605 125.688,41.605 R31.1@126.619,42.536 ; R31.1 R31.1@126.619,42.536 ; v1@126.975,41.351 126.619,41.707 R31.1@126.619,42.536
  other v1: 127.152,41.3
USB_CONNECT: R23.1 U3.17 | length 18.3
  Top Layer w0.254: v1(112.344,51.206) 121.615,51.206 121.869,50.952 v1@121.869,50.698
  Bottom Layer w0.254: U3.17 111.601,52.559 112.319,51.841 v1@112.319,51.206 ; v1@121.831,50.711 122.034,50.711 125.019,47.727 R23.1
  other v1: 122.072,50.724
USB_N: C34.1 R31.2 U3.11 | length 21.1
  Bottom Layer w0.254: U3.11 115.552,57.955 117.45,56.058 117.45,52.044 125.133,44.36 R31.2@126.594,44.36 ; R31.2@126.594,44.36 R31.2 R31.2@126.594,44.36
USB_P: C33.1 R26.1 R28.2 U3.10 | length 25.4
  Bottom Layer w0.254: U3.10 115.789,58.455 117.881,56.363 117.881,52.222 124.892,45.212 127.223,45.212 127.965,44.47 R28.2 C33.1@129.286,44.335 ; C33.1 R26.1@130.658,44.335
USB_VBUS: R27.2 USB2.VBus USB.4 | length 8.4
  Top Layer w0.254: USB.4 121.146,46.572 123.888,46.572 126.391,44.069 USB2.VBus
USB_VBUS_3V3: R27.1 R30.2 U3.58 | length 30.2
  Top Layer w0.254: v1@108.204,66.269 113.487,66.269 v1@118.478,61.277 ; R30.2 v1(122.25,49.327) 123.381,48.196 R27.1@123.381,48.069
  Bottom Layer w0.254: v1@108.204,66.269 108.204,66.116 108.601,65.719 U3.58 ; v1@118.643,61.214 118.643,52.857 122.098,49.403 v1@122.098,49.301
  other v1: 118.618,61.163 108.026,66.269
V+: C2.1 U1.3 | length 4.6
  Top Layer w0.254: C2.1 134.481,49.906 135.163,50.587 U1.3
V-: C5.2 U1.7 | length 4.2
  Top Layer w0.254: C5.2 133.895,54.454 135.163,53.187 U1.7
VBAT: BAT.2 C38.1 C39.1 IC1.1 R32.2 RS232.2 | length 30.2
  Bottom Layer w0.254: R32.2 137.045,67.259 139.522,67.259 140.691,66.091 140.691,64.516 BAT.2
  Bottom Layer w0.889: C38.1 138.938,60.02 138.938,63.144 140.284,64.491 BAT.2 ; 138.938,59.842 138.938,57.633 140.386,56.185 RS232.2
VBAT_MEAS: C42.1 R32.1 R33.2 U3.45 | length 53.3
  Bottom Layer w0.178: 101.739,74.34 102.684,75.286 131.318,75.286 132.029,74.574
  Bottom Layer w0.203: C42.1 100.799,65.114 99.771,66.142 99.771,70.256 101.764,72.25 101.764,73.462 101.739,73.488 101.739,74.34
  Bottom Layer w0.254: C42.1@100.857,65.056 102.081,63.832 103.074,63.832 103.588,63.318 103.588,62.059 102.984,61.455 U3.45 ; R33.2 131.877,70.663 132.029,70.815 132.029,74.574
VOADJ: IC1.4 R34.2 | length 2.1
  Bottom Layer w0.254: R34.2 IC1.4
XTAL1: C12.2 Q1.1 U3.62 | length 6.1
  Bottom Layer w0.254: U3.62 110.601,66.532 111.826,67.757 Q1.1 C12.2@114.603,67.757
XTAL2: C13.2 Q1.3 U3.61 | length 7.2
  Bottom Layer w0.254: C13.2 Q1.3@109.182,69.938 ; Q1.3 110.236,68.922 110.236,67.056 110.101,66.921 U3.61
ZCAR: XBee.12
ZRAC: XBee.16
pads on no net: IC1.5 U1.10 U2.12 U3.4 U3.5 U3.20 U3.24 U3.28 U3.32 U3.52 U3.56 U3.60 U3.64 U6.3 USB2.ID XBee.4 XBee.5 XBee.7 XBee.8 XBee.9 XBee.11 XBee.13 XBee.14 XBee.17 XBee.18 XBee.19 XBee.20 XBee.nc
copper on no net:
  other v4: 125.791,40.73 130.191,40.73

## Polygon pours and split planes (outlines as drawn)
GND on Top Layer "Gnd" (solid, pour order 1003): 140.898,75.848 142.898,73.848 142.898,37.848 140.898,35.848 64.898,35.848 62.898,37.848 62.898,73.848 64.898,75.848
+3.3V on Bottom Layer "+3.3" (solid, pour order 1001): 102.54,64.033 102.718,63.856 102.718,56.464 102.184,55.931 102.184,54.762 105.41,54.762 106.197,53.975 111.582,53.975 112.319,53.238 113.589,54.508 113.589,63.348 113.868,63.348 114.427,63.906 113.614,63.906 112.547,64.973 102.946,64.973 102.54,64.567
VBAT on Bottom Layer "VBAT" (solid, pour order 1000): 136.982,60.35 138.709,62.078 138.938,62.078 138.938,58.039 138.862,57.963 138.862,57.81 136.982,59.69 136.982,59.792
+3.3V on Bottom Layer "GND" (solid, pour order 1000): 106.782,46.304 107.34,46.304 106.782,45.745 106.782,45.593
GND on Bottom Layer "Gnd" (solid, pour order 1002): 140.983,76.009 142.983,74.009 142.983,38.009 140.983,36.009 64.983,36.009 62.983,38.009 62.983,74.009 64.983,76.009

## Keep-outs
Keep-Out Layer:
  the board outline again, w0.94

## Silkscreen, mask and mechanical layers (free items; w line width, h text height)
Top Overlay:
  circle w0.508: c115.582,71.958 r0.115
  circle w0.508: c118.043,71.958 r0.118
  circle w0.508: c102.222,50.648 r0.115
  text "YAPA v2.0" at 99.619,67.894 h1.73
  text "PAPARAZZI PROJECT" at 99.72,66.319 h0.89
  text "+ -" at 137.211,65.456 h1.65 r270
  text "by CDW" at 100.254,64.795 h0.89
  text "GPL" at 99.771,63.221 h0.89
Bottom Overlay:
  circle w0.254: c67,72 r4
  circle w0.254: c67,40 r4
  circle w0.254: c139,40 r4
  circle w0.254: c139,72 r4
Drill Drawing:
  circle w0.254: c139,72 r5
  circle w0.254: c139,40 r5
  circle w0.254: c67,40 r5
  circle w0.254: c67,72 r5
  lines w0.254: 129.718,30.328 139.04,39.649
  text "3mm" at 125.984,28.651 h1.52

## Dimensions
67,40 to 63,38 on Drill Drawing
65,76 to 65,36 on Drill Drawing
63,74 to 143,74 on Drill Drawing